# Altium PCB PCB1.PcbDoc
Units mil, origin at the board's own origin, x right, y up, seen from the top; angles counter-clockwise.
Board outline 3290 x 1330 mil, 2 copper layers (Top Layer, Bottom Layer); 15 components, 19 nets, 126 pads, 28 vias.
Unrouted connection lines stored in the file: 8.
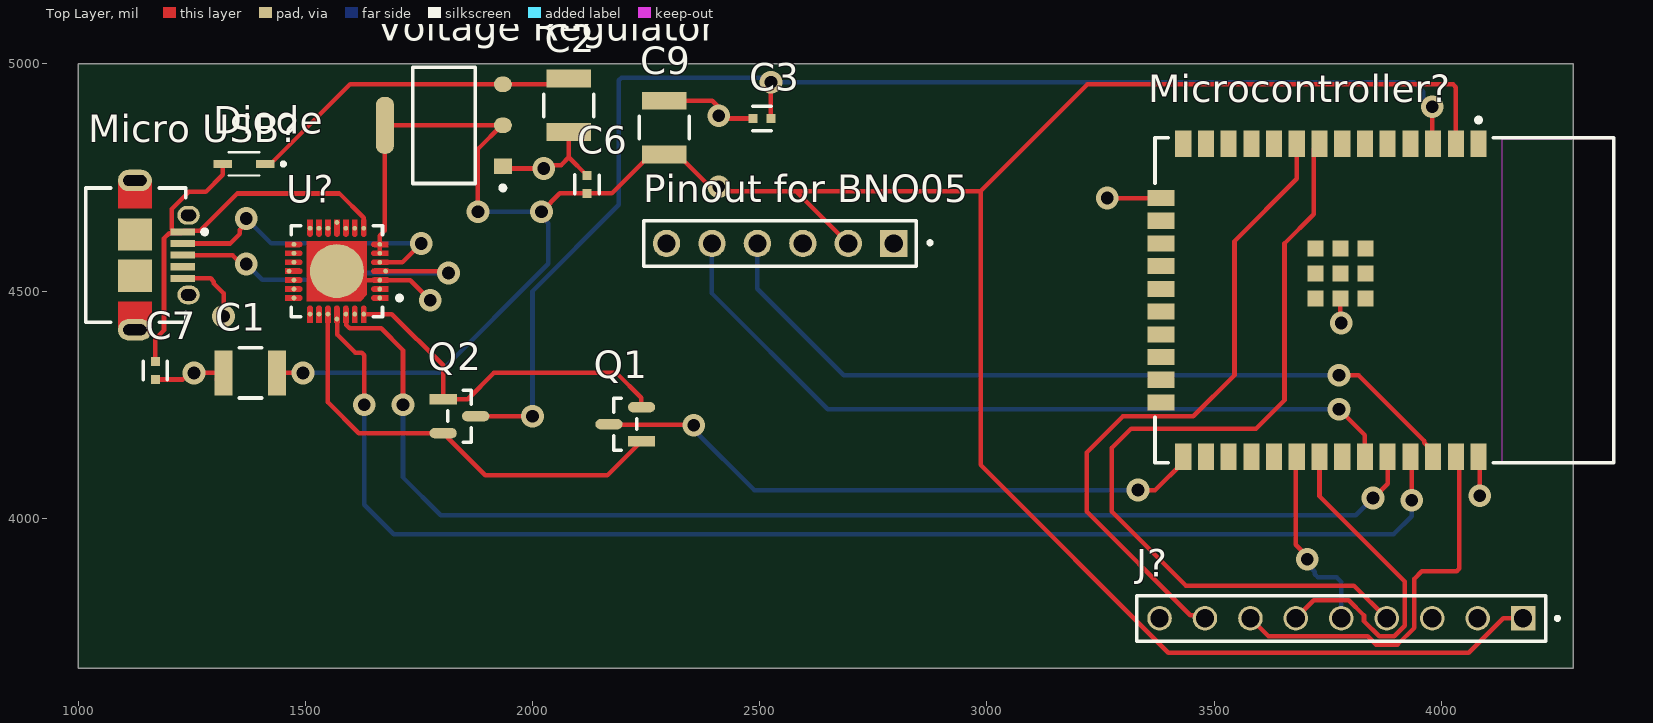
[diagram p0: Top Layer view]
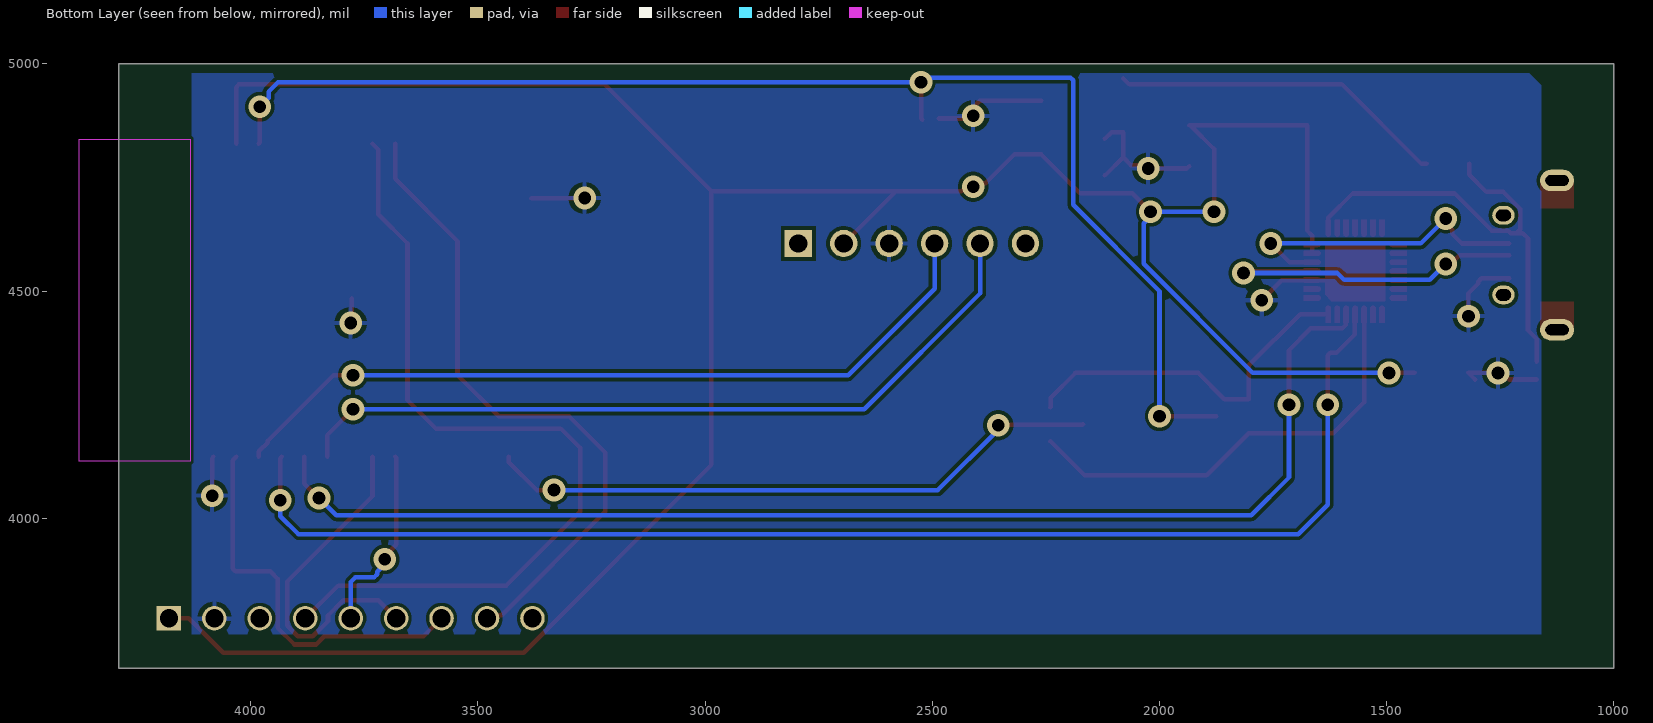
[diagram p1: Bottom Layer view, seen from below]
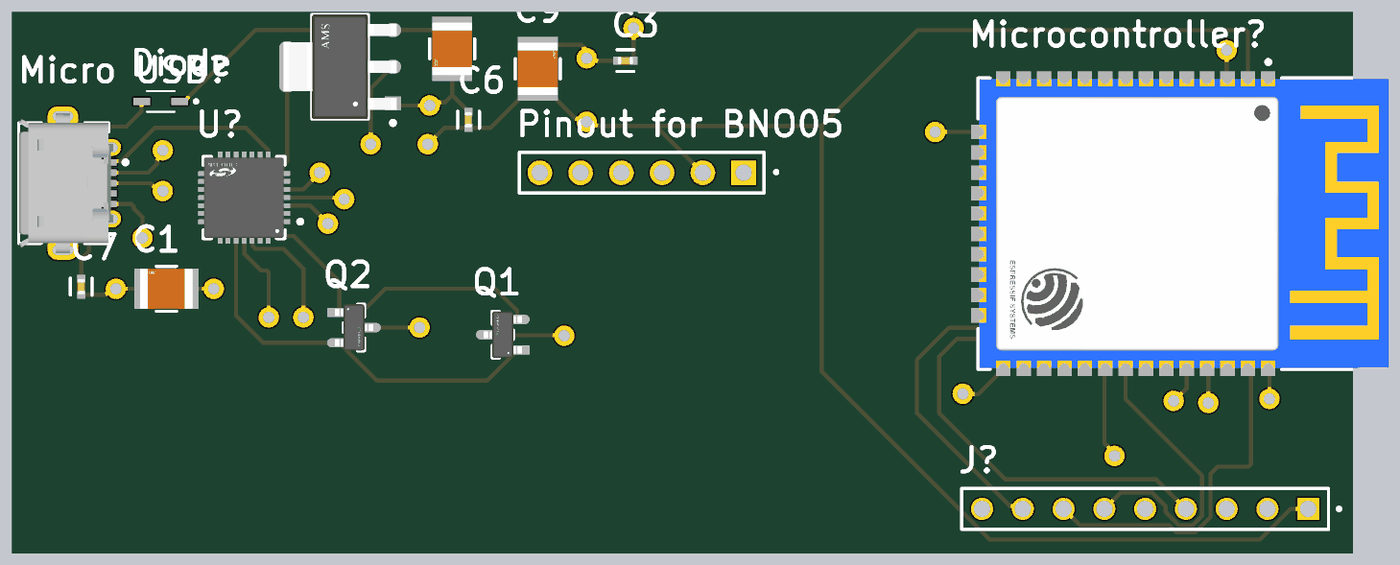
[diagram p2: 3D render of the assembled board from above, using the file's embedded part models]

## Layer stack, top to bottom
Top Solder: solder mask 0.4, Solder Resist, Dk 3.5
Top Layer: signal copper 1.4
Dielectric 1: dielectric 12.6, FR-4, Dk 4.8
Bottom Layer: signal copper 1.4
Bottom Solder: solder mask 0.4, Solder Resist, Dk 3.5

## Board outline
1000,3670 4290,3670 4290,5000 1000,5000

## Design rules (kind name [scope] priority, off if disabled: settings)
Clearance [All] p1: gap=7.8 ignorepadtopadclearanceinfootprint=TRUE
PolygonConnect [All] p1: connectstyle=Relief reliefconductorwidth=10 reliefentries=4 polygonreliefangle="90 Angle" airgapwidth=10
RoutingVias [All] p1: holewidth=28 width=50 viastyle="Through Hole" minholewidth=28 minwidth=50 maxholewidth=28 maxwidth=50
SolderMaskExpansion [All] p1: expansion=4 istentingtop=FALSE
SupplyNets "Schematic Supply Nets" [InNet('GND')] p1: voltage=0.000
Width [All] p1: maxlimit=10 minlimit=10 preferedwidth=10
30 further rules are at their usual default settings.

## Classes and differential pairs
component class Sheet3: C1 C2 C3 C6 C7 C9 Diode J? "Micro USB?" Microcontroller? Q1 U? "Voltage Regulator"

## Components (designator, comment, footprint, x,y, rotation, side; value= is the part's Value field where it differs from the comment)
C1 "12103D106KAT2A" FP-1210-L_3_3_0_4-W_2_5_0-MFG 1379.05,4320 r180 top
C2 "12103D106KAT2A" FP-1210-L_3_3_0_4-W_2_5_0-MFG 2080,4909.05 r270 top
C3 "CC0402KRX5R8BB104" FP-CC0402-MFG 2505,4880 r180 top value="100 nF"
C6 "CC0402KRX5R8BB104" FP-CC0402-MFG 2120,4735 r90 top value="100 nF"
C7 "CC0402KRX5R8BB104" FP-CC0402-MFG 1170,4325.32 r270 top value="100 nF"
C9 "12103D106KAT2A" FP-1210-L_3_3_0_4-W_2_5_0-MFG 2290,4860 r90 top
Diode "BAT760-7" SOD2513X120N 1365,4780 r180 top
J? "TSW-109-14-G-S" SAMTEC_TSW-109-14-G-S 4180,3780 r180 top
"Micro USB?" "47589-0001" MOLX-47589-0001_V 1184.06,4579.37 r270 top
Microcontroller? "ESP32-WROOM-32E (16MB)" FP-ESP32-WROOM-32E_16MB-MFG 3875,4480 r270 top
"Pinout for BNO05" "TSW-106-XX-X-S" SAMTEC_TSW-106-XX-X-S 2545,4605 r180 top
Q1 "BSS138" FP-318-08-IPC_B 2204.17,4207.4 r180 top
Q2 "BSS138" FP-318-08-IPC_B 1839.17,4225 r0 top
U? "CP2102N-A02-GQFN28" FP-CP2102N-A02-GQFN28-MFG 1569.49,4544.06 r180 top
"Voltage Regulator" "AMS1117-3.3" FP-AMS1117-IPC_C 1805,4865 r180 top

## Footprints (in the part's own frame and the unit in brackets; to place one, negate y for a bottom-side part, rotate by r counter-clockwise, add the part's x,y. Pads: shape width x height; smd on the part's side, far side on the other; paste and mask are expansions set on the pad)
FP-318-08-IPC_B [mm]
  rect 1.524x0.578 smd paste+0 mask+0: 1(-0.91,0.95)
  rrect100% 1.524x0.578 smd paste+0 mask+0: 2(-0.91,-0.95) 3(0.91,0)
  silkscreen extent -0.65,-1.45 0.65,1.45, body extent -1.92,-1.7 1.92,1.7, height 0.25
FP-1210-L_3_3_0_4-W_2_5_0-MFG [mm]
  rect 1x2.5 smd paste+0 mask+0: 1(-1.5,0) 2(1.5,0)
  silkscreen extent -0.62,-1.4 0.62,1.4, body extent -2.1,-1.5 2.1,1.5, height 0.25
FP-AMS1117-IPC_C [mm]
  rect 1.004x0.872 smd paste+0 mask+0: 1(-3.295,2.29)
  rrect100% 1.004x0.872 smd paste+0 mask+0: 2(-3.295,0) 3(-3.295,-2.29)
  rrect87% 1.004x3.182 smd paste+0 mask+0: 4(3.295,0)
  silkscreen extent -3.42,-3.25 1.75,3.62, body extent -3.9,-3.35 3.9,3.35, height 0.25
FP-CC0402-MFG [mm]
  rect 0.5x0.5 smd paste+0 mask+0: 1(-0.5,0) 2(0.5,0)
  silkscreen extent -0.53,-0.68 0.53,0.67, body extent -0.87,-0.48 0.87,0.48, height 0.25
FP-CP2102N-A02-GQFN28-MFG [mm]
  round 0.27 smd paste+0 mask+0: 1(-2.4,1.5) 2(-2.4,1) 3(-2.4,0.5) 4(-2.725,0) 5(-2.4,-0.5) 6(-2.4,-1) 7(-2.4,-1.5) 8(-1.5,-2.4) 9(-1,-2.4) 10(-0.5,-2.4) 11(0,-2.725) 12(0.5,-2.4) 13(1,-2.4) 14(1.5,-2.4) 15(2.4,-1.5) 16(2.4,-1) 17(2.4,-0.5) 18(2.675,0) 19(2.4,0.5) 20(2.4,1) 21(2.4,1.5) 22(1.5,2.4) 23(1,2.4) 24(0.5,2.4) 25(0,2.675) 26(-0.5,2.4) 27(-1,2.4) 28(-1.5,2.4)
  round 3.015 smd paste-1000 mask+0: 29(0,0)
  Top Layer region: -1.35,2.875 -1.35,2.075 -1.361,2.018 -1.394,1.969 -1.443,1.936 -1.5,1.925 -1.5,1.925 -1.557,1.936 -1.606,1.969 -1.639,2.018 -1.65,2.075 -1.65,2.075 -1.65,2.875
  Top Layer region: -0.85,2.875 -0.85,2.075 -0.861,2.018 -0.894,1.969 -0.943,1.936 -1,1.925 -1,1.925 -1.057,1.936 -1.106,1.969 -1.139,2.018 -1.15,2.075 -1.15,2.075 -1.15,2.875
  Top Layer region: -0.35,2.875 -0.35,2.075 -0.361,2.018 -0.394,1.969 -0.443,1.936 -0.5,1.925 -0.5,1.925 -0.557,1.936 -0.606,1.969 -0.639,2.018 -0.65,2.075 -0.65,2.075 -0.65,2.875
  Top Layer region: 0.15,2.875 0.15,2.075 0.139,2.018 0.106,1.969 0.057,1.936 0,1.925 0,1.925 -0.057,1.936 -0.106,1.969 -0.139,2.018 -0.15,2.075 -0.15,2.075 -0.15,2.875
  Top Layer region: 0.65,2.875 0.65,2.075 0.639,2.018 0.606,1.969 0.557,1.936 0.5,1.925 0.5,1.925 0.443,1.936 0.394,1.969 0.361,2.018 0.35,2.075 0.35,2.075 0.35,2.875
  Top Layer region: 1.15,2.875 1.15,2.075 1.139,2.018 1.106,1.969 1.057,1.936 1,1.925 1,1.925 0.943,1.936 0.894,1.969 0.861,2.018 0.85,2.075 0.85,2.075 0.85,2.875
  Top Layer region: 1.65,2.875 1.65,2.075 1.639,2.018 1.606,1.969 1.557,1.936 1.5,1.925 1.5,1.925 1.443,1.936 1.394,1.969 1.361,2.018 1.35,2.075 1.35,2.075 1.35,2.875
  Top Layer region: 1.35,-2.875 1.35,-2.075 1.361,-2.018 1.394,-1.969 1.443,-1.936 1.5,-1.925 1.5,-1.925 1.557,-1.936 1.606,-1.969 1.639,-2.018 1.65,-2.075 1.65,-2.075 1.65,-2.875
  Top Layer region: 0.85,-2.875 0.85,-2.075 0.861,-2.018 0.894,-1.969 0.943,-1.936 1,-1.925 1,-1.925 1.057,-1.936 1.106,-1.969 1.139,-2.018 1.15,-2.075 1.15,-2.075 1.15,-2.875
  Top Layer region: 0.35,-2.875 0.35,-2.075 0.361,-2.018 0.394,-1.969 0.443,-1.936 0.5,-1.925 0.5,-1.925 0.557,-1.936 0.606,-1.969 0.639,-2.018 0.65,-2.075 0.65,-2.075 0.65,-2.875
  Top Layer region: -0.15,-2.875 -0.15,-2.075 -0.139,-2.018 -0.106,-1.969 -0.057,-1.936 0,-1.925 0,-1.925 0.057,-1.936 0.106,-1.969 0.139,-2.018 0.15,-2.075 0.15,-2.075 0.15,-2.875
  Top Layer region: -0.65,-2.875 -0.65,-2.075 -0.639,-2.018 -0.606,-1.969 -0.557,-1.936 -0.5,-1.925 -0.5,-1.925 -0.443,-1.936 -0.394,-1.969 -0.361,-2.018 -0.35,-2.075 -0.35,-2.075 -0.35,-2.875
  Top Layer region: -1.15,-2.875 -1.15,-2.075 -1.139,-2.018 -1.106,-1.969 -1.057,-1.936 -1,-1.925 -1,-1.925 -0.943,-1.936 -0.894,-1.969 -0.861,-2.018 -0.85,-2.075 -0.85,-2.075 -0.85,-2.875
  Top Layer region: -1.65,-2.875 -1.65,-2.075 -1.639,-2.018 -1.606,-1.969 -1.557,-1.936 -1.5,-1.925 -1.5,-1.925 -1.443,-1.936 -1.394,-1.969 -1.361,-2.018 -1.35,-2.075 -1.35,-2.075 -1.35,-2.875
  Top Layer region: 2.875,1.35 2.075,1.35 2.018,1.361 1.969,1.394 1.936,1.443 1.925,1.5 1.925,1.5 1.936,1.557 1.969,1.606 2.018,1.639 2.075,1.65 2.075,1.65 2.875,1.65
  Top Layer region: 2.875,0.85 2.075,0.85 2.018,0.861 1.969,0.894 1.936,0.943 1.925,1 1.925,1 1.936,1.057 1.969,1.106 2.018,1.139 2.075,1.15 2.075,1.15 2.875,1.15
  Top Layer region: 2.875,0.35 2.075,0.35 2.018,0.361 1.969,0.394 1.936,0.443 1.925,0.5 1.925,0.5 1.936,0.557 1.969,0.606 2.018,0.639 2.075,0.65 2.075,0.65 2.875,0.65
  Top Layer region: 2.875,-0.15 2.075,-0.15 2.018,-0.139 1.969,-0.106 1.936,-0.057 1.925,0 1.925,0 1.936,0.057 1.969,0.106 2.018,0.139 2.075,0.15 2.075,0.15 2.875,0.15
  Top Layer region: 2.875,-0.65 2.075,-0.65 2.018,-0.639 1.969,-0.606 1.936,-0.557 1.925,-0.5 1.925,-0.5 1.936,-0.443 1.969,-0.394 2.018,-0.361 2.075,-0.35 2.075,-0.35 2.875,-0.35
  Top Layer region: 2.875,-1.15 2.075,-1.15 2.018,-1.139 1.969,-1.106 1.936,-1.057 1.925,-1 1.925,-1 1.936,-0.943 1.969,-0.894 2.018,-0.861 2.075,-0.85 2.075,-0.85 2.875,-0.85
  Top Layer region: 2.875,-1.65 2.075,-1.65 2.018,-1.639 1.969,-1.606 1.936,-1.557 1.925,-1.5 1.925,-1.5 1.936,-1.443 1.969,-1.394 2.018,-1.361 2.075,-1.35 2.075,-1.35 2.875,-1.35
  Top Layer region: -2.875,-1.35 -2.075,-1.35 -2.018,-1.361 -1.969,-1.394 -1.936,-1.443 -1.925,-1.5 -1.925,-1.5 -1.936,-1.557 -1.969,-1.606 -2.018,-1.639 -2.075,-1.65 -2.075,-1.65 -2.875,-1.65
  Top Layer region: -2.875,-0.85 -2.075,-0.85 -2.018,-0.861 -1.969,-0.894 -1.936,-0.943 -1.925,-1 -1.925,-1 -1.936,-1.057 -1.969,-1.106 -2.018,-1.139 -2.075,-1.15 -2.075,-1.15 -2.875,-1.15
  Top Layer region: -2.875,-0.35 -2.075,-0.35 -2.018,-0.361 -1.969,-0.394 -1.936,-0.443 -1.925,-0.5 -1.925,-0.5 -1.936,-0.557 -1.969,-0.606 -2.018,-0.639 -2.075,-0.65 -2.075,-0.65 -2.875,-0.65
  Top Layer region: -2.875,0.15 -2.075,0.15 -2.018,0.139 -1.969,0.106 -1.936,0.057 -1.925,0 -1.925,0 -1.936,-0.057 -1.969,-0.106 -2.018,-0.139 -2.075,-0.15 -2.075,-0.15 -2.875,-0.15
  Top Layer region: -2.875,0.65 -2.075,0.65 -2.018,0.639 -1.969,0.606 -1.936,0.557 -1.925,0.5 -1.925,0.5 -1.936,0.443 -1.969,0.394 -2.018,0.361 -2.075,0.35 -2.075,0.35 -2.875,0.35
  Top Layer region: -2.875,1.15 -2.075,1.15 -2.018,1.139 -1.969,1.106 -1.936,1.057 -1.925,1 -1.925,1 -1.936,0.943 -1.969,0.894 -2.018,0.861 -2.075,0.85 -2.075,0.85 -2.875,0.85
  Top Layer region: -2.875,1.65 -2.075,1.65 -2.018,1.639 -1.969,1.606 -1.936,1.557 -1.925,1.5 -1.925,1.5 -1.936,1.443 -1.969,1.394 -2.018,1.361 -2.075,1.35 -2.075,1.35 -2.875,1.35
  Top Layer region: -1.675,1.325 -1.325,1.675 1.675,1.675 1.675,-1.675 -1.675,-1.675 -1.675,1.325
  silkscreen extent -3.63,-2.55 2.55,2.55, body extent -2.98,-2.98 2.98,2.98, height 0.25
FP-ESP32-WROOM-32E_16MB-MFG [mm]
  rect 1.5x0.9 smd paste+0 mask+0: 1(-8.75,5.26) 2(-8.75,3.99) 3(-8.75,2.72) 4(-8.75,1.45) 5(-8.75,0.18) 6(-8.75,-1.09) 7(-8.75,-2.36) 8(-8.75,-3.63) 9(-8.75,-4.9) 10(-8.75,-6.17) 11(-8.75,-7.44) 12(-8.75,-8.71) 13(-8.75,-9.98) 14(-8.75,-11.25) 25(8.75,-11.25) 26(8.75,-9.98) 27(8.75,-8.71) 28(8.75,-7.44) 29(8.75,-6.17) 30(8.75,-4.9) 31(8.75,-3.63) 32(8.75,-2.36) 33(8.75,-1.09) 34(8.75,0.18) 35(8.75,1.45) 36(8.75,2.72) 37(8.75,3.99) 38(8.75,5.26)
  rect 0.9x1.5 smd paste+0 mask+0: 15(-5.715,-12.5) 16(-4.445,-12.5) 17(-3.175,-12.5) 18(-1.905,-12.5) 19(-0.635,-12.5) 20(0.635,-12.5) 21(1.905,-12.5) 22(3.175,-12.5) 23(4.445,-12.5) 24(5.715,-12.5)
  rect 0.9x0.9 smd paste+0 mask+0: 39(-2.9,-2.46) 39(-2.9,-1.06) 39(-2.9,-3.86) 39(-1.5,-1.06) 39(-1.5,-2.46) 39(-1.5,-3.86) 39(-0.1,-1.06) 39(-0.1,-2.46) 39(-0.1,-3.86)
  Keep-Out Layer region: -9,6.56 9,6.56 9,12.75 -9,12.75
  silkscreen extent -10.2,-12.83 9.07,12.82, body extent -9.6,-13.35 9.6,12.93, height 0.25
MOLX-47589-0001_V [mm] "SMD, 5-Leads, Body 7.5x5.6mm, Pitch 0.65mm"
  rect 0.4x1.35 smd: 1(-1.3,1.175) 2(-0.65,1.175) 3(0,1.175) 4(0.65,1.175) 5(1.3,1.175)
  oval 1.05x1.25 hole 0.65 slot 0.85 at 90 deg: 6(-2.225,1.5) 7(2.225,1.5)
  oval 1.2x1.9 hole 0.6 slot 1.3 at 90 deg: 8(-4.175,-1.5) 11(4.175,-1.5)
  rect 1.8x1.9 smd: 9(-1.15,-1.5) 10(1.15,-1.5)
  Top Layer region: -2.6,-0.55 -4.175,-0.55 -4.175,-2.45 -2.6,-2.45
  Top Layer region: 2.6,-2.45 4.175,-2.45 4.175,-0.55 2.6,-0.55
  silkscreen extent -3.75,-4.25 3.75,2.53, body extent -4.32,-4.25 4.32,1.64, height 2.74
SAMTEC_TSW-106-XX-X-S [mm]
  rect 1.53x1.53 / inner round 1.53 / far side rect 1.53x1.53 hole 1.02: 01(-6.35,0)
  round 1.53 hole 1.02: 02(-3.81,0) 03(-1.27,0) 04(1.27,0) 05(3.81,0) 06(6.35,0)
  silkscreen extent -8.48,-1.27 7.62,1.27
SAMTEC_TSW-109-14-G-S [mm]
  rect 1.37x1.37 / inner round 1.37 / far side rect 1.37x1.37 hole 1.02: 01(0,0)
  round 1.37 hole 1.02: 02(2.54,0) 03(5.08,0) 04(7.62,0) 05(10.16,0) 06(12.7,0) 07(15.24,0) 08(17.78,0) 09(20.32,0)
  silkscreen extent -2.02,-1.27 21.59,1.27
SOD2513X120N [mm]
  rect 1.04x0.46 smd: A(1.19,0) C(-1.19,0)
  silkscreen extent -2.3,-0.65 0.85,0.65

## Part data
C1 C2 C9: library part CMP-2000-05477-2, "General Purpose Ceramic Capacitor, 1210, 10uF, 10%, X5R, 15%, 25V", Capacitance=10uF, Case Code (Imperial)=1210, Case Code (Metric)=3225, Dielectric=X5R, Max Operating Temperature=85°C, Min Operating Temperature=-55°C, Package Quantity=1, Tolerance=10%, Voltage=25V, Case/Package=1210, Construction=Flat, Contact Plating=Tin, Depth=2.5mm, Height=2.29mm, Lead Free="Lead Free", Length=3.2mm, Mount="Surface Mount", Packaging="Tape and Reel", Radiation Hardening=No, REACH SVHC="No SVHC", RoHS Compliant=Yes, Series=-, Termination=SMD/SMT, Thickness=0.11inch, Voltage Rating=25V, Voltage Rating (DC)=25V, Width=0.098inch
C3 C6 C7: library part CMP-03422-000607-1, "CAP CER 0.1UF 25V X5R 0402", Capacitance="100 nF", Manufacturer=YAGEO, Package=CC0402, Temperature="-55°C to +125°C", Temperature Characteristic=X5R, Temperature Coefficient=30ppm/°C, Temperature Range High=+125°C, Temperature Range Low=-55°C, Tolerance=0.1, Voltage Rating="25 V", Automotive=No, Automotive Grade=NA, Category=Cap, ComponentLink2Description=Datasheet, ComponentLink2URL=http://www.yageo.com/documents/recent/UPY-GP_NP0_16V-to-50V_16.pdf, Device Class L1="Passive Components", Device Class L2=Capacitors, Device Class L3="Ceramic Capacitors", Digikey Description="CAP CER 0.1UF 25V X5R 0402", Footprint Url=http://www.yageo.com/exep/pages/download/literatures/UPY-C_GEN_24.pdf, Height=0.55mm, Ipc Land Pattern Name=CAPC10050X50, Lead Free=Yes, Manufacturer Part Number=CC0402KRX5R8BB104, Material=Ceramic, Mouser Description="Multilayer Ceramic Capacitors MLCC - SMD/SMT 100nF 25V X5R 10%", Octopart=https://octopart.com/cc0402krx5r8bb104-yageo-20779263, RoHS=TRUE
Diode: "Diode Schottky 30V 1A 2-Pin SOD-323 T/R", Package=None, Availability=Good, DigiKey-Purchase-URL=https://snapeda.com/shop?store=DigiKey&id=4817231, MF="Diodes Zetex", Mouser-Purchase-URL=https://snapeda.com/shop?store=Mouser&id=4817231, MP=BAT760-7, Price=None, SnapEDA_Link=https://www.snapeda.com/parts/BAT760-7/Zetex/view-part/4817231/?ref=snap
J?: "Connector Header Through Hole 9 position 0.100 (2.54mm)", Package=None, Check_prices=https://www.snapeda.com/parts/TSW-109-14-G-S/Samtec/view-part/?ref=eda, MF=Samtec, MP=TSW-109-14-G-S, SnapEDA_Link=https://www.snapeda.com/parts/TSW-109-14-G-S/Samtec/view-part/?ref=snap
"Micro USB?": library part CMP-2000-05610-1, "Right Angle Female Type AB Micro USB Connector, 30 V, 1.8 A, -30 to 85 degC, RoHS, Tape and Reel", Color=Black, Current Rating=1.8A, Manufacturer=Molex, Operating Temperature Range=-20Cto+85C, Package Description="Micro USB Connector, Pitch 0.65 mm, 5 Positions, Body 7.5 x 5.6 mm", Voltage Rating=30VAC, Brand=Molex, Connector Type=MicroUSBTypeABreceptacle, Contact Material=CopperAlloy, Contact Plating=Gold, Datasheet URL=http://www.molex.com/webdocs/datasheets/pdf/en-us/0475890001_IO_CONNECTORS.pdf, Datasheet Version=12/2016, Gender=Female, Manufacturer URL=http://www.molex.com/, Mounting Angle=Right, Mounting Technology=SurfaceMount, Number of Contacts=5Contact, Number of Ports=1Port, Package Reference=47589-0001, Package URL=http://www.molex.com/pdm_docs/sd/475890001_sd.pdf, Packaging=Reel, Product=MicroUSBTypeABConnectors, Product Category=USBConnectors, RoHS=True, Series=47589, Standard=USB, Termination Style=SMD/SMT
Microcontroller?: library part CMP-194065-000027-1, "RX TXRX MOD WIFI TRACE ANT SMD"
"Pinout for BNO05": "Connector Header Through Hole 6 position 0.100 (2.54mm)", Package=None, Check_prices=https://www.snapeda.com/parts/TSW-106-26-T-S/Samtec/view-part/?ref=eda, MF=Samtec, MP=TSW-106-26-T-S, SnapEDA_Link=https://www.snapeda.com/parts/TSW-106-26-T-S/Samtec/view-part/?ref=snap
Q1 Q2: library part CMP-07173-000101-1, "MOSFET N-CH 50V 220MA SOT-23", Case/Package=SOT-23, Continuous Drain Current (ID)=220mA, Drain to Source Breakdown Voltage=50V, Drain to Source Resistance=3.5R, Gate to Source Voltage (Vgs)=20V, Input Capacitance=27pF, Max Operating Temperature=150°C, Max Power Dissipation=360mW, Min Operating Temperature=-55°C, On-State Resistance=6R, Package Quantity=1, Threshold Voltage=1.3V, Contact Plating=Tin, Current Rating=220mA, Drain to Source Voltage (Vdss)=50V, Dual Supply Voltage=50V, Element Configuration=Single, Fall Time=9ns, Height=0.93mm, Lead Free="Lead Free", Length=2.92mm, Mount="Surface Mount", Nominal Vgs=1.3V, Number of Elements=1, Number of Pins=3, Packaging="Tape and Reel", Power Dissipation=360mW, Radiation Hardening=No, Rds On Max=3.5R, REACH SVHC="No SVHC", Rise Time=9ns, Termination=SMD/SMT, Turn-Off Delay Time=20ns, Turn-On Delay Time=2.5ns, Voltage Rating (DC)=50V, Weight=0.03g, Width=1.3mm
U?: library part CMP-08093-000005-1, "IC USB TO UART BRIDGE QFN28"
"Voltage Regulator": library part CMP-209535-000001-1, "LDO Voltage Regulators 1A, 3.3V", Dropout Voltage=1.1V, Manufacturer="Advanced Monolithic Systems", Max Junction Temp=+125°C, Max Power Dissipation=1.2W, Max Supply Voltage=15V, Nominal Supply Current=5mA, Output Current=1A, Output Voltage=3.3V, Package=AMS1117, Temperature="-40°C to +125°C", Temperature Range Low=-40°C, Automotive=No, Category=IC, ComponentLink2Description=Datasheet, ComponentLink2URL=http://www.advanced-monolithic.com/pdf/ds1117.pdf, Device Class L1="Integrated Circuits (ICs)", Device Class L2="Power Management ICs", Device Class L3="Voltage Regulators - Linear", Height=1.8mm, Ipc Land Pattern Name=SOT229P700X180-4, Lead Free=Yes, Manufacturer Part Number=AMS1117-3.3, Number Of Outputs=1, Octopart=https://octopart.com/ams1117-3.3-advanced+monolithic+systems-25899300, Output Type=Fixed, RoHS=TRUE, Standoff Height=0.64mm, Temperature Range High=+125°C

## Via types
v1: diameter 50, hole 28, Top Layer to Bottom Layer, 28 vias

## Nets (pads, with @x,y where several pads share a name; then routed paths per layer and width w, separated by ;. In a path a pad name is that pad's centre, name@x,y a point inside that pad or via, vN(x,y) a via of type N, cw(c..) or ccw(c..) an arc to the next point about the centre after c; other vN are vias at no path point)
GND: "Micro USB?.5" "Pinout for BNO05.03" "Voltage Regulator.1" C1.2 C2.2 C3.2 C6.2 C7.2 C9.2 J?.02 Microcontroller?.15 Microcontroller?.38 Microcontroller?.39 U?.3 U?.29 | length 1396
  Top Layer w10: C7.2 1229.81,4305.63 1244.18,4320 v1(1255,4320) C1.2 C1.2@1305.63,4305.63 ; 1233.19,4525.31 1230.32,4528.19 1291.81,4528.19 1298.88,4521.12 1298.88,4516.94 1320,4495.82 v1(1320,4445) ; U?.29 1589.05,4524.49 1663.86,4524.49 U?.3 1730.63,4524.37 v1(1775,4480) ; 1934.72,4774.84 1939.57,4770 v1(2025,4770) 2032.65,4777.65 2062.97,4777.65 2080,4794.68 ; C6.2 2080,4794.68 ; C2.2@2120,4835.31 2105.31,4850 C2.2 2080,4794.68 ; C9.2@2260.47,4919.05 C9.2 2395.95,4919.05 2410,4905 v1(2410,4885.86) 2415.86,4880 C3.2 C3.2@2485.16,4880.16 ; v1(3265,4705) Microcontroller?.15 ; Microcontroller?.39@3778.15,4483.94 3778.15,4431.85 v1(3780,4430) ; Microcontroller?.38 4085,4132.6 v1(4085,4050)
NetC1_1: "Pinout for BNO05.02" "Voltage Regulator.2" "Voltage Regulator.4" C1.1 C6.1 C9.1 J?.01 Microcontroller?.2 U?.6 U?.7 | length 6198.2
  Top Layer w10: C1.1 v1(1495,4320) ; U?.6 U?.7 1664.1,4603.23 1664.1,4622.24 1675.28,4633.42 1675.28,4865 1932.12,4865 ; v1(1880,4675) 1880,4812.88 1932.12,4865 ; 1934.72,4865 1932.12,4865 ; v1(2020,4675) 2060.31,4715.31 C6.1 2174.84,4715.31 2260.47,4800.95 C9.1 2319.53,4800.95 2382.82,4737.65 2402.35,4737.65 v1(2410,4730) 2417.65,4722.35 2433.51,4722.35 2435.86,4720 2580,4720 ; 2695,4605 2580,4720 ; Microcontroller?.2 4032.09,4949.14 4026.23,4955 3221.07,4955 2986.07,4720 ; J?.01 4136.24,3780 4060.87,3704.63 3399.13,3704.63 2986.07,4117.69 2986.07,4720 ; 2580,4720 2986.07,4720
  Bottom Layer w10: v1(1495,4320) 1795,4320 2035,4560 2035,4649.18 2020,4664.18 v1(2020,4675) v1(1880,4675)
NetC2_1: "Voltage Regulator.3" C2.1 Diode.C | length 746.1
  Top Layer w10: Diode.C 1423.27,4780 1598.43,4955.16 1934.72,4955.16 2067.05,4955.16 C2.1
NetC3_1: C3.1 Microcontroller?.3 Q2.3 | length 2935.8
  Top Layer w10: Q2.3 v1(2000,4225) ; C3.1@2522.34,4877.66 C3.1 2524.84,4880.16 2524.84,4959.84 v1(2525,4960) ; v1(3980,4905.82) 3980,4826.57 Microcontroller?.3
  Bottom Layer w10: v1(2000,4225) 2000,4499.83 2190,4689.83 2190,4964.14 2195.86,4970 2515,4970 v1(2525,4960) 3940,4960 3960.68,4939.32 3960.68,4925.14 v1(3980,4905.82)
NetC7_1: "Micro USB?.1" C7.1 Diode.A U?.8 | length 1025
  Top Layer w10: C7.1 1170,4394.71 1188.98,4413.7 1188.98,4616.18 1200.48,4627.68 1227.44,4627.68 1230.32,4630.55 1233.19,4633.43 1268.43,4633.43 1350,4715 1575.11,4715 1628.54,4661.57 U?.8 ; 1211.62,4630.55 1205.7,4636.46 1205.7,4680.83 1243.26,4718.39 1280.59,4718.39 1318.15,4755.94 Diode.A
NetJ?_04: J?.04 Microcontroller?.8 | length 1862.3
  Top Layer w10: Microcontroller?.8 3719.37,4811.77 3719.37,4669.37 3655,4605 3655,4260 3592.34,4197.34 3317.34,4197.34 3275,4155 3275,4015 3437.8,3852.2 3807.8,3852.2 J?.04
NetJ?_05: J?.05 Microcontroller?.30 | length 422
  Top Layer w10: Microcontroller?.30 3680,4133.43 3680,3941.57 3705,3916.57 v1(3705,3910)
  Bottom Layer w10: v1(3705,3910) 3705,3899.18 3721.57,3882.61 3721.57,3877.07 3728.64,3870 3770,3870 3780,3860 J?.05
NetJ?_06: J?.06 Microcontroller?.31 | length 755.9
  Top Layer w10: J?.06 3719.77,3819.77 3796.47,3819.77 3830,3786.24 3830,3773.76 3863.53,3740.23 3896.47,3740.23 3919.77,3763.53 3919.77,3861.09 3732.09,4048.77 Microcontroller?.31
NetJ?_07: J?.07 Microcontroller?.37 | length 865.4
  Top Layer w10: J?.07 3619.77,3740.23 3838.35,3740.23 3856.15,3722.43 3903.85,3722.43 3940.23,3758.82 3940.23,3866.67 3957.32,3883.76 4034.14,3883.76 4040,3889.62 4040,4127.6 Microcontroller?.37
NetJ?_08: J?.08 Microcontroller?.9 | length 1449
  Top Layer w10: J?.08 3472.82,3787.18 3447.82,3787.18 3220,4015 3220,4145 3299.48,4224.48 3454.48,4224.48 3545,4315 3545,4610 3682.09,4747.09 Microcontroller?.9
"NetMicro USB?_2": "Micro USB?.2" U?.5 | length 690.1
  Top Layer w10: 1230.32,4604.96 1334.96,4604.96 1356.15,4626.15 1356.15,4635.33 1370,4649.18 v1(1370,4660) ; U?.5 1713.74,4563.74 v1(1755,4605)
  Bottom Layer w10: v1(1370,4660) 1425,4605 v1(1755,4605)
"NetMicro USB?_3": "Micro USB?.3" U?.4 | length 753.3
  Top Layer w10: 1230.32,4579.37 1339.81,4579.37 1359.18,4560 v1(1370,4560) ; U?.4 1676.89,4543.94 1811.06,4543.94 v1(1815,4540)
  Bottom Layer w10: v1(1370,4560) 1405,4525 1593.83,4525 1608.83,4540 v1(1815,4540)
NetMicrocontroller?_25: Microcontroller?.25 Q1.3 | length 1367.5
  Top Layer w10: Q1.3 2169.53,4206.2 2353.8,4206.2 v1(2355,4205) ; v1(3332.65,4062.35) 3359.27,4062.35 3360,4061.62 3370,4061.62 3432.09,4123.7 Microcontroller?.25
  Bottom Layer w10: v1(2355,4205) 2355,4195 2487.65,4062.35 v1(3332.65,4062.35)
NetMicrocontroller?_33: "Pinout for BNO05.05" Microcontroller?.33 | length 1723.8
  Top Layer w10: v1(3775,4240) 3832.09,4182.91 Microcontroller?.33
  Bottom Layer w10: 2395,4605 2395,4495 2650,4240 v1(3775,4240)
NetMicrocontroller?_34: Microcontroller?.34 U?.26 | length 2741.3
  Top Layer w10: U?.26 1589.17,4449.4 1590.15,4448.42 1590.15,4425.57 1597.65,4418.07 1666.93,4418.07 1715,4370 v1(1715,4250) ; v1(3850,4045) 3850.53,4045 3882.09,4076.55 Microcontroller?.34
  Bottom Layer w10: v1(1715,4250) 1715,4090 1797.8,4007.2 3812.2,4007.2 v1(3850,4045)
NetMicrocontroller?_35: Microcontroller?.35 U?.25 | length 2922.3
  Top Layer w10: U?.25 1569.49,4438.57 1570.47,4437.59 1570.47,4404.53 1610,4365 1624.14,4365 1630,4359.14 v1(1630,4250) ; Microcontroller?.35 3935,4132.6 v1(3935,4040)
  Bottom Layer w10: v1(1630,4250) 1630,4030 1695,3965 3895,3965 3935,4005 v1(3935,4040)
NetMicrocontroller?_36: "Pinout for BNO05.04" Microcontroller?.36 | length 1749.1
  Top Layer w10: v1(3775,4315) 3817.94,4315 3962.6,4170.34 3962.6,4166.81 3982.09,4147.32 Microcontroller?.36
  Bottom Layer w10: 2495,4605 2495,4505 2685,4315 v1(3775,4315)
NetQ1_1: Q1.1 Q2.2 U?.24 | length 982.3
  Top Layer w10: U?.24@1549.8,4449.33 1549.68,4449.45 U?.24 1549.8,4255.2 1617.4,4187.6 Q2.2 1895.93,4095 2165,4095 Q1.1
NetQ1_2: Q1.2 Q2.1 U?.28 | length 799.3
  Top Layer w10: U?.28 1690.43,4449.57 1803.33,4336.67 Q2.1 1857.4,4262.4 1915,4320 2185,4320 2239.68,4265.32 2239.68,4245.13 Q1.2
pads on no net: "Micro USB?.4" "Micro USB?.6" "Micro USB?.7" "Micro USB?.8" "Micro USB?.9" "Micro USB?.10" "Micro USB?.11" "Pinout for BNO05.01" "Pinout for BNO05.06" J?.03 J?.09 Microcontroller?.1 Microcontroller?.4 Microcontroller?.5 Microcontroller?.6 Microcontroller?.7 Microcontroller?.10 Microcontroller?.11 Microcontroller?.12 Microcontroller?.13 Microcontroller?.14 Microcontroller?.16 Microcontroller?.17 Microcontroller?.18 Microcontroller?.19 Microcontroller?.20 Microcontroller?.21 Microcontroller?.22 Microcontroller?.23 Microcontroller?.24 Microcontroller?.26 Microcontroller?.27 Microcontroller?.28 Microcontroller?.29 Microcontroller?.32 U?.1 U?.2 U?.9 U?.10 U?.11 U?.12 U?.13 U?.14 U?.15 U?.16 U?.17 U?.18 U?.19 U?.20 U?.21 U?.22 U?.23 U?.27

## Polygon pours and split planes (outlines as drawn)
GND on Bottom Layer "GND_L02_P000" (solid, pour order 0): 4130,3745 4130,4980 1186.34,4980 1160,4953.66 1160,3745 1195,3745

## Text inside footprints (layer, text, board x,y; h text height)
"Micro USB?": Mechanical 1 "PCB EDGE" at 1085.63,4354.96 h39.37 r270